# Altium PCB LDR_Module.PcbDoc
Units mm, origin at the board's own origin, x right, y up, seen from the top; angles counter-clockwise.
Board outline 18.5 x 40 mm, 2 copper layers (Top Layer, Bottom Layer), stack 1.571 mm thick; 11 components, 7 nets, 31 pads, 2 vias.
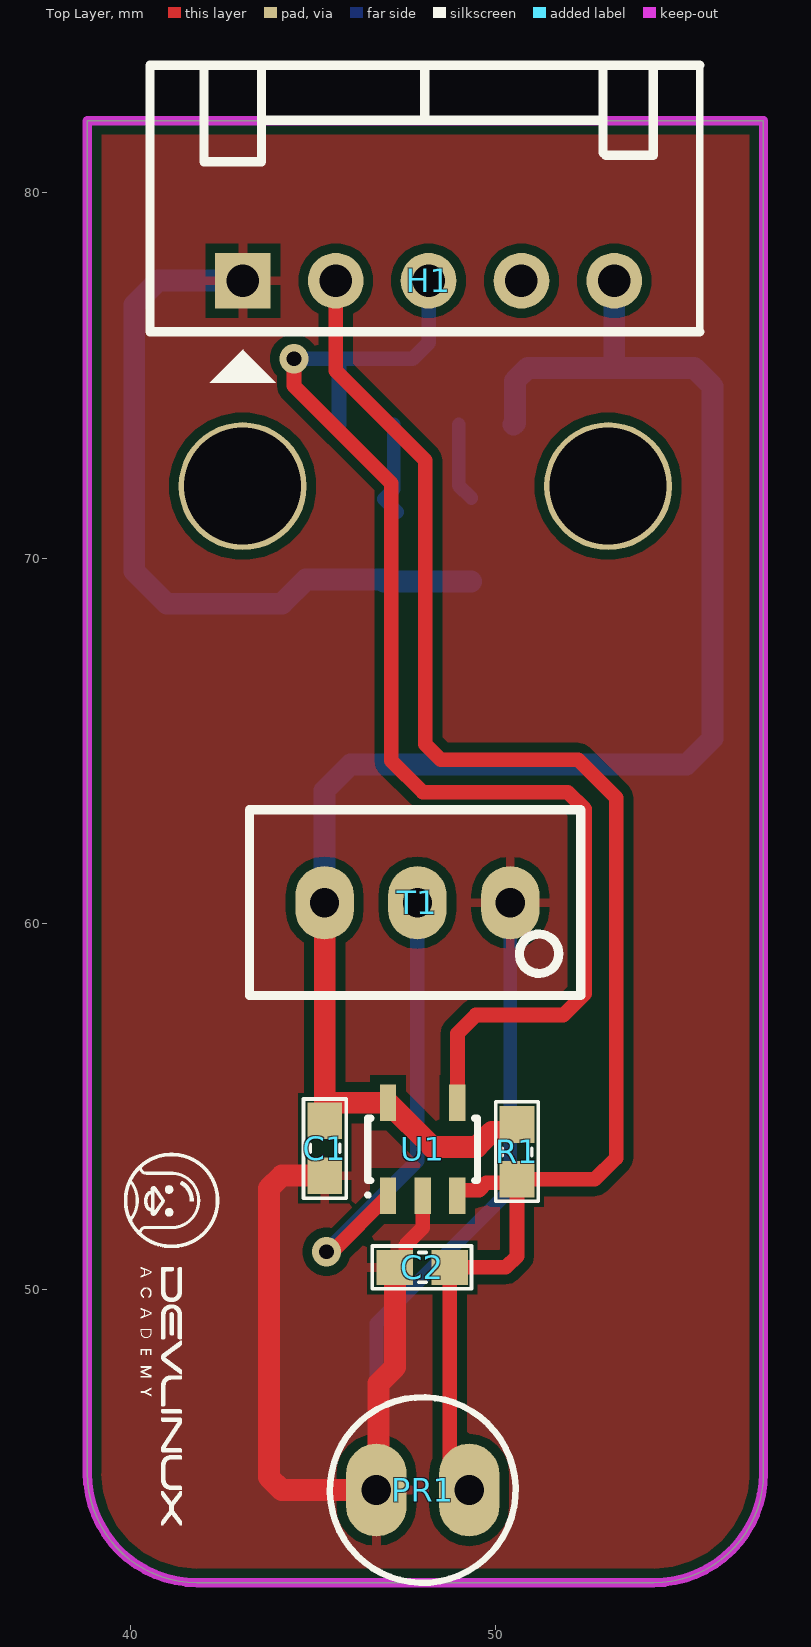
[diagram p0: Top Layer view]
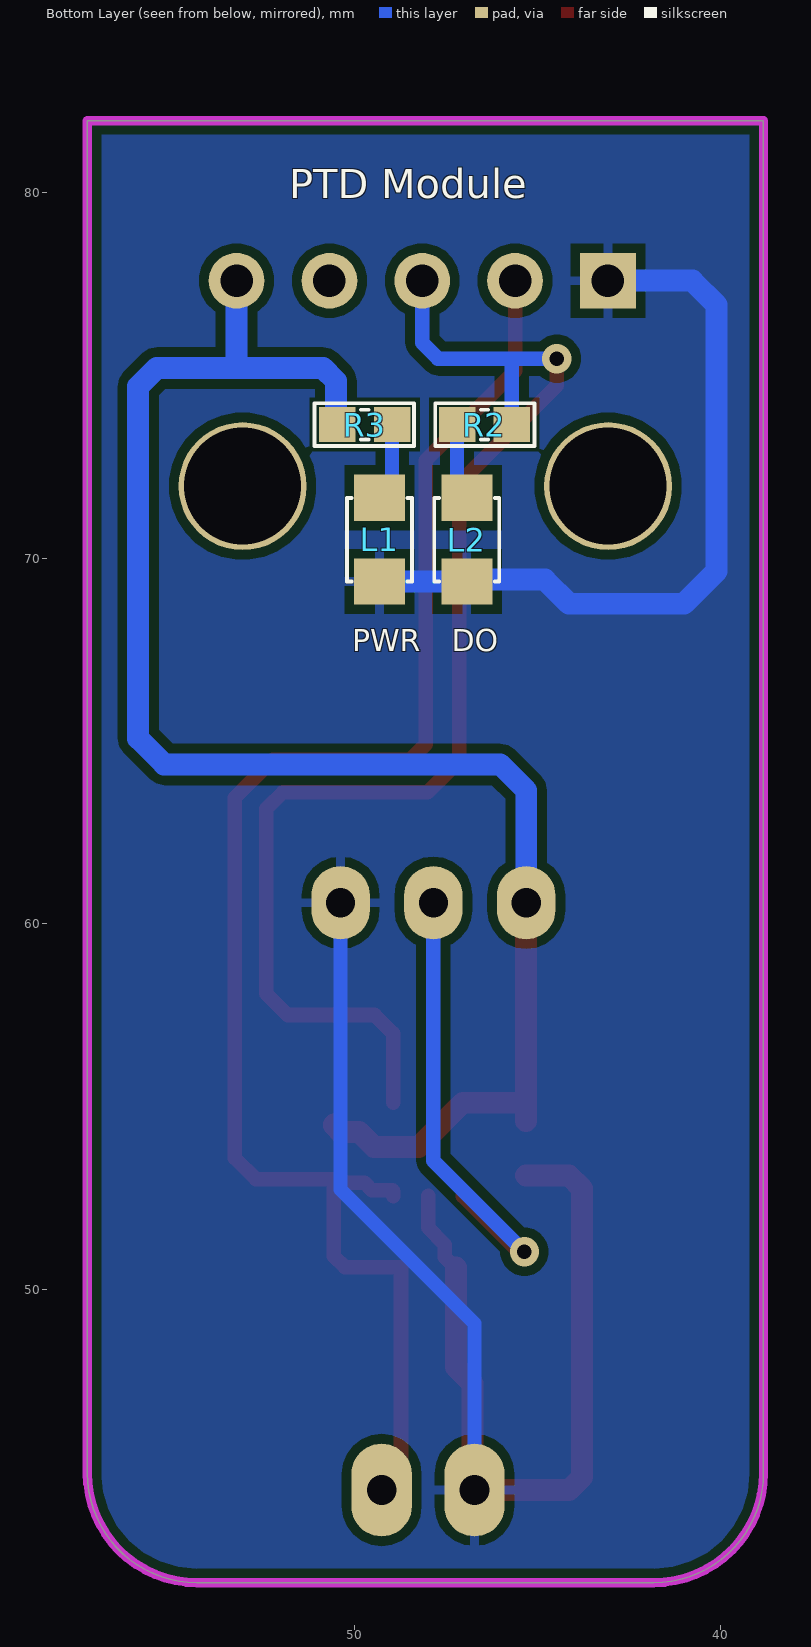
[diagram p1: Bottom Layer view, seen from below]
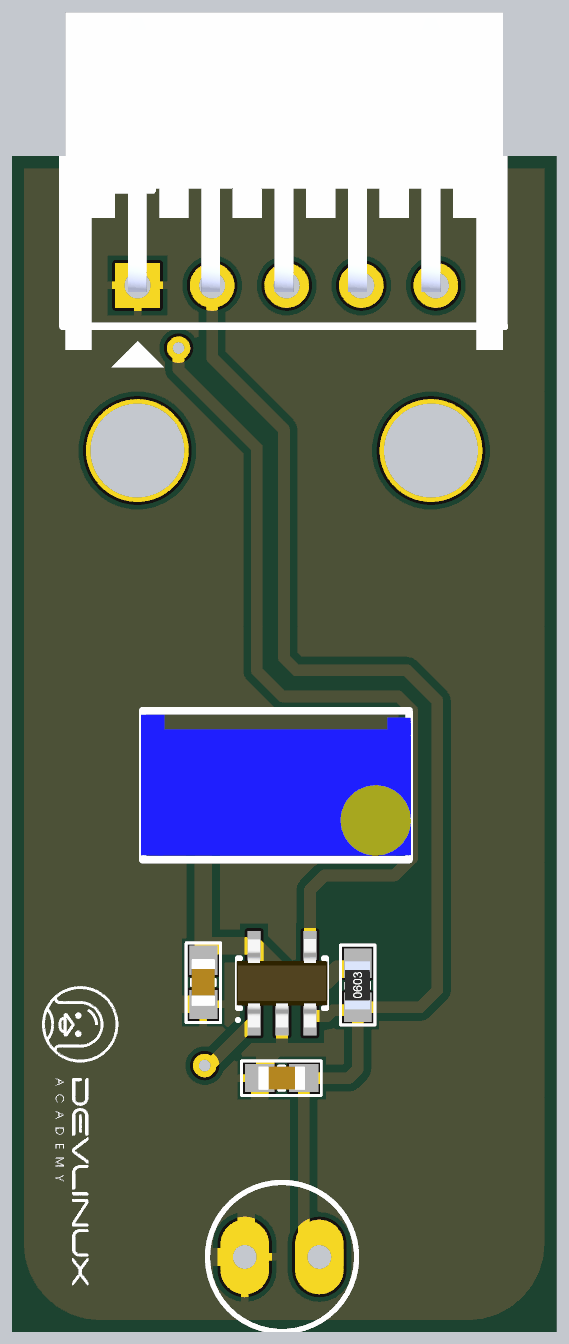
[diagram p2: 3D render of the assembled board from above, using the file's embedded part models]
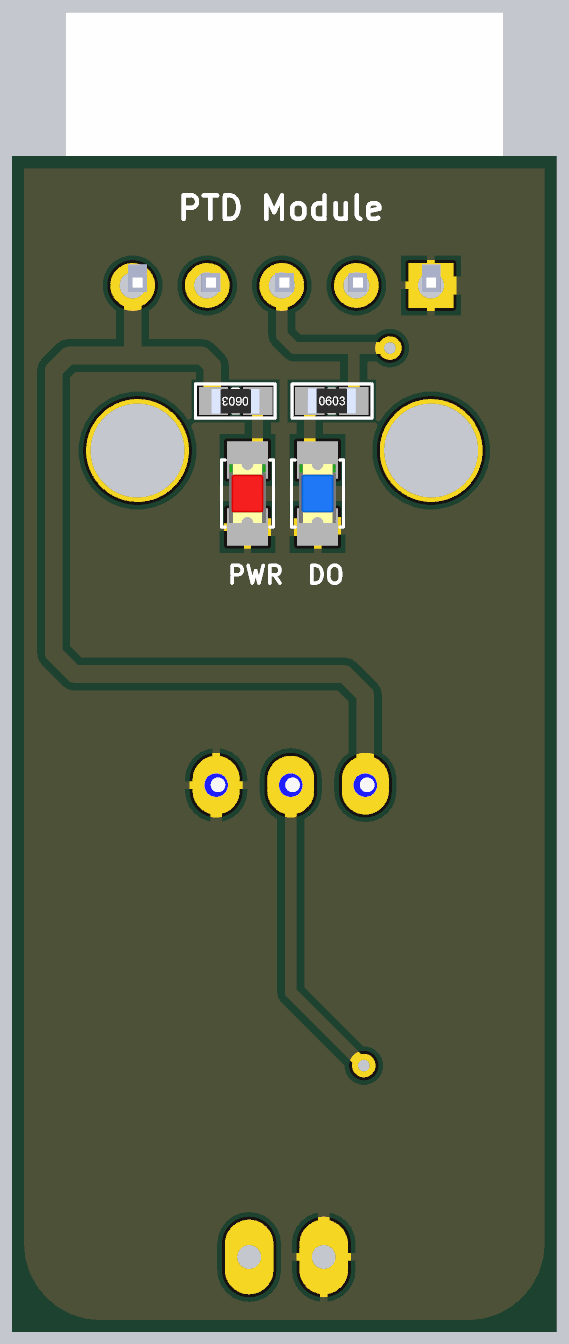
[diagram p3: 3D render of the assembled board from below, using the file's embedded part models]

## Layer stack, top to bottom
Top Solder: solder mask 0.0102, Solder Resist, Dk 3.5
Top Layer: signal copper 0.0356
Dielectric 1: dielectric 1.5, FR-4, Dk 4.8
Bottom Layer: signal copper 0.0356
Bottom Solder: solder mask 0.0102, Solder Resist, Dk 3.5

## Board outline
41.822,41.975 cw(c41.822,44.975) 38.822,44.975 38.822,81.975 57.322,81.975 57.322,44.975 cw(c54.322,44.975) 54.322,41.975

## Design rules (kind name [scope] priority, off if disabled: settings)
Clearance [All] p1: gap=0.254 ignorepadtopadclearanceinfootprint=FALSE except(0: Arc-Hole Track-Hole SMDPad-Hole THPad-Hole Via-Hole Fill-Hole Poly-Hole Region-Hole Text-Hole)
PolygonConnect [All] p1: connectstyle=Relief reliefconductorwidth=0.254 reliefentries=4 polygonreliefangle="90 Angle" airgapwidth=0.254
RoutingVias [All] p1: holewidth=0.4 width=0.8 viastyle="Through Hole" minholewidth=0.3 minwidth=0.6 maxholewidth=0.5 maxwidth=1
SolderMaskExpansion [All] p1: expansion=0.102 istentingtop=FALSE
Width [All] p1: maxlimit=0.6 minlimit=0.254 preferedwidth=0.4
30 further rules are at their usual default settings.

## Components (designator, comment, footprint, x,y, rotation, side; value= is the part's Value field where it differs from the comment)
C1 "100nF" "tu 0603" 45.318,53.861 r270 top
C2 "100nF" "tu 0603" 47.988,50.601 r180 top
H1 "Header 5P 2.54 Duc Cong" "Header 5P DC 2.54" 43.078,77.597 r90 top
L1 "LED RED" LED-0805-Red 49.327,71.653 r270 bottom
L2 "LED BLUE" LED-0805-Blue 46.939,71.653 r270 bottom
PR1 "CDS 5537 5mm" "Quang Tro" 46.73,44.51 r0 top
R1 "10k" "tro smd 0603" 50.578,53.761 r90 top
R2 "1k" "tro smd 0603" 46.457,73.66 r180 bottom
R3 "1k" "tro smd 0603" 49.733,73.66 r0 bottom
T1 "10K" "Bien Tro Vi Chinh Dung" 47.854,60.579 r180 top
U1 "LM321" sot23-5 47.998,53.831 r90 top

## Footprints (in the part's own frame and the unit in brackets; to place one, negate y for a bottom-side part, rotate by r counter-clockwise, add the part's x,y. Pads: shape width x height; smd on the part's side, far side on the other; paste and mask are expansions set on the pad)
"Bien Tro Vi Chinh Dung" [mm] "Bien tro vi chinh"
  oval 1.6x2 hole 0.8: 1(-2.54,0) 2(0,0) 3(2.54,0)
  silkscreen extent -4.47,-2.54 4.6,2.54, body extent -4.54,-2.4 4.66,2.4, height 12.02
"Header 5P DC 2.54" [mil]
  rect 60x60 hole 35: 1(0,0)
  round 60 hole 35: 2(0,-100) 3(0,-200) 4(0,-300) 5(0,-400)
  silkscreen extent -110,-492 232,100, body extent -87,-490 366,97, height 240
LED-0805-Blue [mil]
  rect 50x55 smd: 1(0,0) 2(90,0)
  silkscreen extent 0,-35 90,35, body extent 5,-25 85,25, height 43
LED-0805-Red [mil]
  rect 50x55 smd: 1(0,0) 2(90,0)
  silkscreen extent 0,-35 90,35, body extent 5,-25 85,25, height 43
"Quang Tro" [mil] "QUANG TRO"
  oval 65x100 hole 32: 1(0,0) 2(100,0)
  silkscreen extent -50,-100 150,100
sot23-5 [mm]
  rect 1x0.45 smd: 1(-1.275,0.95) 2(-1.275,0) 3(-1.275,-0.95) 4(1.275,-0.95) 5(1.275,0.95)
  silkscreen extent -1.3,-1.5 0.85,1.55, body extent -1.5,-1.55 1.5,1.55, height 1.1
"tro smd 0603" [mm] "Chip Capacitor, 2-Leads, Body 1,60x0,80mm, IPC Medium Density"
  rect 1x0.95 smd mask+0.076: 1(-0.75,0) 2(0.75,0)
  silkscreen extent -1.35,-0.58 1.37,0.58, body extent -0.82,-0.42 0.82,0.43, height 0.44
"tu 0603" [mm] "Chip Capacitor, 2-Leads, Body 1,60x0,80mm, IPC Medium Density"
  rect 1x0.95 smd mask+0.076: 1(-0.75,0) 2(0.75,0)
  silkscreen extent -1.35,-0.58 1.37,0.58, body extent -0.8,-0.4 0.8,0.4, height 0.9

## Part data
C1 C2: library part "Tu 0603 104 50V 10%", "Dán", Chung_Loai=Dán, Don_Vi=Con, Ma_Hang=MH004568, So_Chan=2, Ten_Linh_Kien="Tụ 0603 104-100nF 10% 50V"
H1: "Cắm", Chung_Loai=Cắm, Don_Vi=Con, Ma_Hang=MH001308, Ten_Linh_Kien="Header 5P XH2.54-5P Đực Cong"
L1: library part "LED 0805 Do", "Dán", Chung_Loai=Dán, Don_Vi=Con, Ma_Hang=MH000897, Ten_Linh_Kien="LED 0805 Màu Đỏ (Red)"
L2: library part "LED 0805 Xanh Duong", "Dán", Chung_Loai=Dán, Don_Vi=Con, Ma_Hang=MH002327, Ten_Linh_Kien="LED 0805 Màu Xanh Dương (Blue)"
PR1: library part "Quang Tro", "Photoresistor", Creator="Bien Nguyen"
R1: library part "Tro 0603 1% 10k", "Dán", Chung_Loai=Dán, Don_Vi=Con, Ma_Hang=MH006333, So_Chan=2, Ten_Linh_Kien="Trở 0603 1% 10k"
R2 R3: library part "Tro 0603 1% 1k", "Dán", Chung_Loai=Dán, Don_Vi=Con, Ma_Hang=MH006334, So_Chan=2, Ten_Linh_Kien="Trở 0603 1% 1k"
T1: library part "Bien Tro Tinh Chinh 10K Dung", "Cắm", Chung_Loai=Cắm, Don_Vi=Con, Ma_Hang=MH003232, Ten_Linh_Kien="Biến Trở VR 103-10K 3296W"
U1: "Opamp"

## Free pads (board coordinates)
  round 3.5 hole 3.2: 2(43.072,71.975) 2(53.072,71.975)

## Via types
v1: diameter 0.8, hole 0.4, Top Layer to Bottom Layer, 2 vias

## Nets (pads, with @x,y where several pads share a name; then routed paths per layer and width w, separated by ;. In a path a pad name is that pad's centre, name@x,y a point inside that pad or via, vN(x,y) a via of type N, cw(c..) or ccw(c..) an arc to the next point about the centre after c; other vN are vias at no path point)
+5: C1.1 H1.5 R1.2 R3.2 T1.3 U1.5 | length 45.3
  Top Layer w0.6: T1.3 45.318,60.574 C1.1@45.318,55.106 ; C1.1 C1.1@45.318,55.106 ; R1.2 50.578,54.486 50.403,54.311 49.891,54.311 49.479,53.899 48.255,53.899 U1.5 C1.1@45.318,55.106
  Bottom Layer w0.6: T1.3 45.314,63.652 46.025,64.364 55.22,64.364 55.931,65.075 55.931,74.701 55.423,75.209 53.238,75.209 ; R3.2 50.521,73.697 50.521,74.858 50.872,75.209 53.238,75.209 ; H1.5 53.238,75.209
A_OUT: C2.1 H1.2 PR1.2 R1.1 U1.3 | length 44.6
  Top Layer w0.4: H1.2 45.618,75.133 48.064,72.688 48.064,64.916 48.489,64.491 52.248,64.491 53.289,63.449 53.289,53.594 52.706,53.011 R1.1 ; U1.3 48.948,52.689 48.973,52.714 49.539,52.714 49.738,52.913 50.481,52.913 R1.1 ; PR1.2 48.738,45.042 C2.1 50.27,50.601 50.578,50.909 R1.1
D_OUT: H1.3 R2.2 U1.4 | length 36.2
  Top Layer w0.4: v1(44.475,75.463) 44.475,74.727 47.142,72.06 47.142,64.465 48.006,63.602 51.968,63.602 52.426,63.144 52.426,58.09 51.841,57.506 49.454,57.506 48.948,57 U1.4
  Bottom Layer w0.4: v1(44.475,75.463) 45.707,75.463 ; R2.2 45.707,75.463 ; H1.3 48.158,75.895 47.727,75.463 45.707,75.463
GND: C1.2 C2.2 H1.1 L1.2 L2.2 PR1.1 T1.1 U1.2 | length 59.2
  Top Layer w0.4: C2.2 47.263,50.601 47.538,50.876 47.538,51.221 47.998,51.681 U1.2
  Top Layer w0.6: C1.2 44.141,53.111 43.79,52.759 43.79,44.861 44.141,44.51 PR1.1 46.787,44.567 46.787,47.422 47.238,47.873 C2.2
  Bottom Layer w0.381: PR1.1 46.73,49.067 50.394,52.73 T1.1
  Bottom Layer w0.6: H1.1 40.767,77.597 40.107,76.937 40.107,69.647 40.996,68.758 44.145,68.758 44.806,69.418 46.888,69.418 L2.2 L1.2
NetL1_1: L1.1 R3.1 | length 2.1
  Bottom Layer w0.381: R3.1 48.983,71.997 L1.1
NetL2_1: L2.1 R2.1 | length 2.6
  Bottom Layer w0.381: R2.1 47.207,71.895 46.939,71.628 L2.1@47.295,71.273
NetT1_2: T1.2 U1.1 | length 12.9
  Top Layer w0.4: v1(45.364,51.029) 45.521,51.029 U1.1
  Bottom Layer w0.4: v1(45.364,51.029) 47.854,53.518 T1.2
pads on no net: H1.4

## Polygon pours and split planes (outlines as drawn)
GND on Bottom Layer "GND_L02_P000" (solid, remove dead copper, pour order 0): 34.392,85.7 35.382,84.709 60.935,84.709 60.935,38.176 60.427,38.684 33.376,38.684
GND on Top Layer "GND_L01_P001" (solid, remove dead copper, pour order 1): 35.433,85.801 36.119,85.115 60.096,85.115 60.096,38.735 59.995,38.837 35.281,38.837

## Keep-outs
Keep-Out Layer:
  the board outline again, w0.254

## Silkscreen, mask and mechanical layers (free items; w line width, h text height)
Top Overlay:
  drawing of 21 lines, arcs and shapes, not listed
Bottom Overlay:
  text "PTD Module" at 51.793,79.855 h0.8
  text "DO" at 47.353,67.455 h0.6
  text "PWR" at 50.07,67.455 h0.6